# EAGLE board MRCS-Remote-Switch-Motor-Controller-Array (EAGLE 7.7.0)
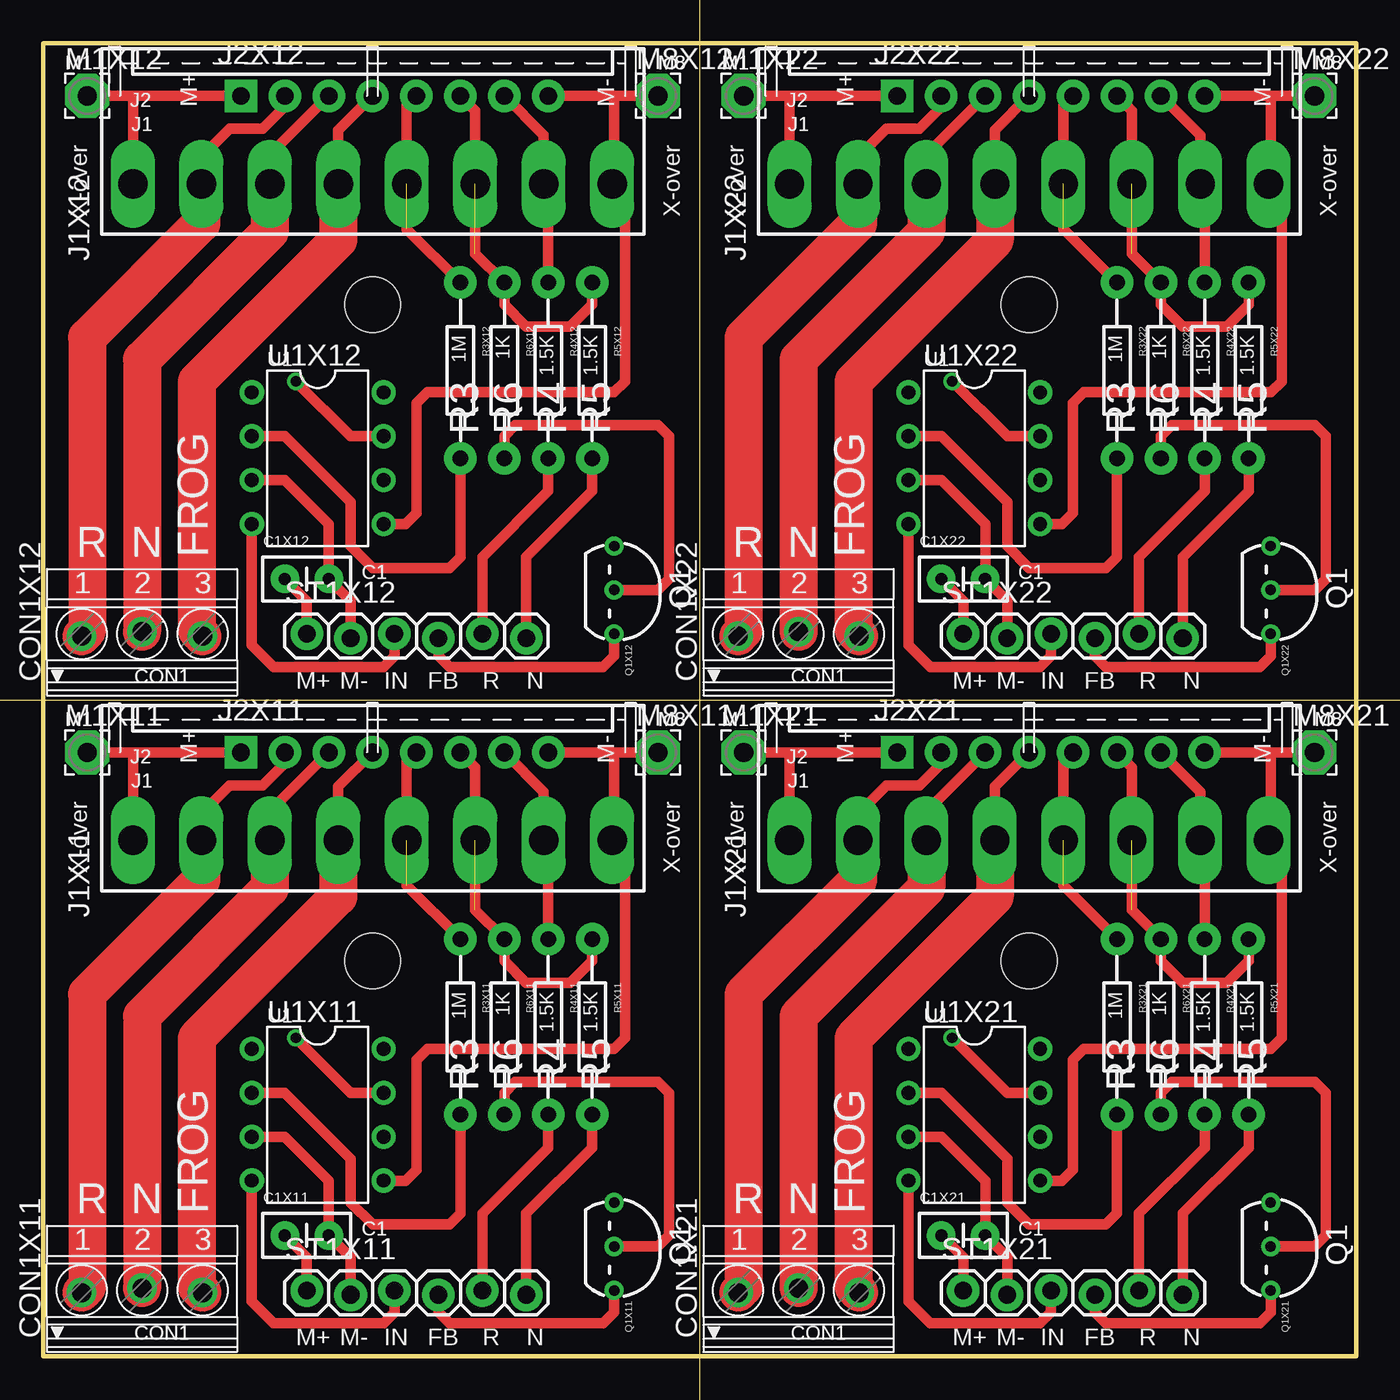
[diagram p0: board, top side]
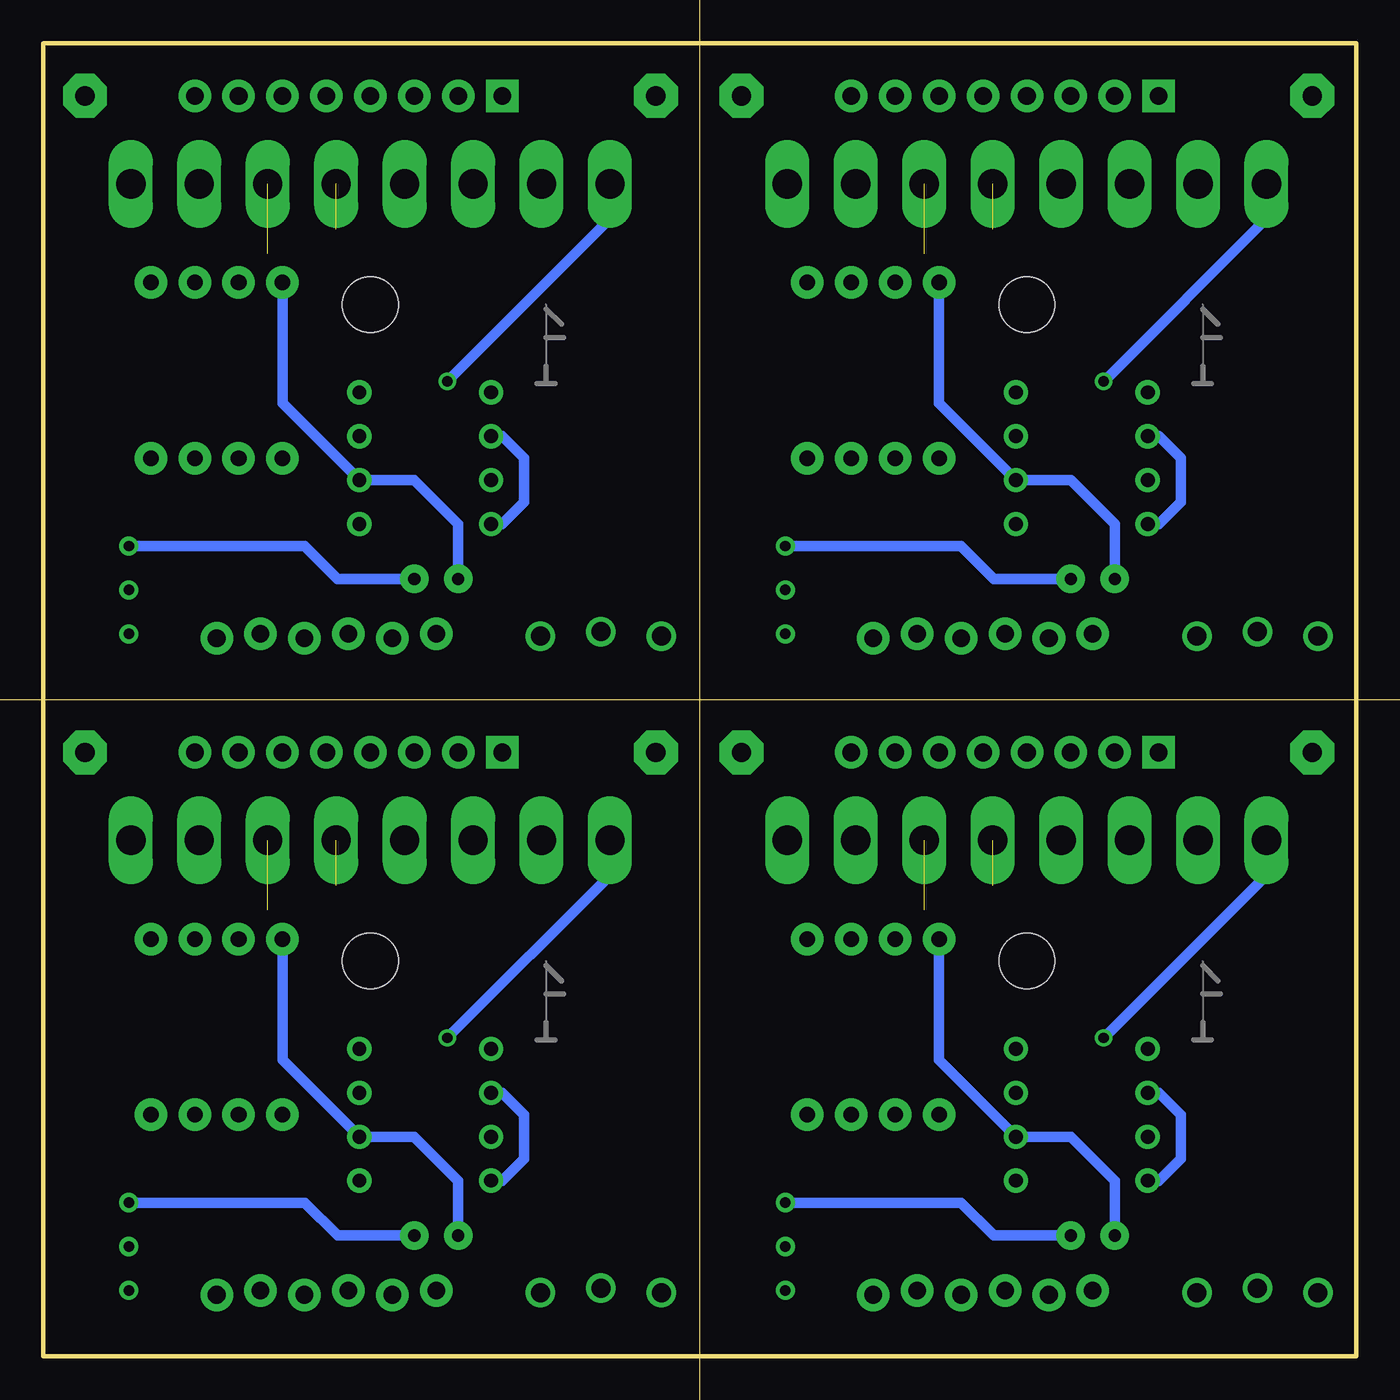
[diagram p1: board, bottom side, seen from below]

Size 75.95 x 75.95 mm. Coordinates in mm from the lower left corner, seen from the top.
Outline: 0,0 75.95,0 75.95,75.95 0,75.95 0,0
Copper layers (1*16): Top 0.035mm / dielectric 1.5mm / Bottom 0.035mm
Design rules "default": minimum track width 10mil, minimum drill 24mil, track to track 8mil, track to pad 8mil, pad to pad 8mil, via to via 8mil, smd to smd 8mil, copper to edge 40mil, drill to drill 8mil, minimum pad ring 10mil, minimum via ring 8mil, stop-mask expansion 4mil, vias tented up to drill 0mil, thermal gap 10mil
Holes 3.2 mm at 19.05,22.86 19.05,60.83 57.02,22.86 57.02,60.83
Milling: 2 lines

## Footprints (pad centres in the part's own frame; a part is rotated, then mirrored left to right if it is on the bottom)
CAP-PTH-SMALLEZ = drill 0.7 pad 1.651: 1 0,0; 2 2.54,0
1751251 = drill 1.1 pad 1.7: 1 -3.5,-0.127; 2 0,0.127; 3 3.5,-0.127
KK-156-8-F = drill 1.7 pad 2.184 long: 1 -13.86,0; 2 -9.9,0; 3 -5.94,0; 4 -1.98,0; 5 1.98,0; 6 5.94,0; 7 9.9,0; 8 13.86,0
1X08_PIN1_NO_SILK = drill 1.016 pad 1.88 square: 1 0,0 | drill 1.016 pad 1.88: 2 2.54,0; 3 5.08,0; 4 7.62,0; 5 10.16,0; 6 12.7,0; 7 15.24,0; 8 17.78,0
2,54/1,1 = drill 1.118 pad 2.54 octagon: 1 0,0
TO-92-MS013 = drill 0.6: 1 -2.54,0; 2 0,0; 3 2.54,0
AXIAL-0.4-RES = drill 0.9 pad 1.88: P$1 -5.08,0; P$2 5.08,0
1X06_LOCK = drill 1.016 pad 1.88: 1 0,0; 2 2.54,-0.254; 3 5.08,0; 4 7.62,-0.254; 5 10.16,0; 6 12.7,-0.254
DIL08 = drill 0.8 pad 1.4: 1 -3.81,-3.81; 2 -1.27,-3.81; 3 1.27,-3.81; 4 3.81,-3.81; 5 3.81,3.81; 6 1.27,3.81; 7 -1.27,3.81; 8 -3.81,3.81

## Placement (x,y rotation side)
C1X11  .01uF  [CAP-PTH-SMALLEZ]  13.97,6.99 0 top
C1X12  .01uF  [CAP-PTH-SMALLEZ]  13.97,44.96 0 top
C1X21  .01uF  [CAP-PTH-SMALLEZ]  51.94,6.99 0 top
C1X22  .01uF  [CAP-PTH-SMALLEZ]  51.94,44.96 0 top
CON1X11  CONNECTOR-M03350-LOCK  [1751251]  5.71,3.81 0 top
CON1X12  CONNECTOR-M03350-LOCK  [1751251]  5.71,41.78 0 top
CON1X21  CONNECTOR-M03350-LOCK  [1751251]  43.69,3.81 0 top
CON1X22  CONNECTOR-M03350-LOCK  [1751251]  43.69,41.78 0 top
J1X11  J1  [KK-156-8-F]  19.05,29.84 0 top
J1X12  J1  [KK-156-8-F]  19.05,67.82 0 top
J1X21  J1  [KK-156-8-F]  57.02,29.84 0 top
J1X22  J1  [KK-156-8-F]  57.02,67.82 0 top
J2X11  J2  [1X08_PIN1_NO_SILK]  11.43,34.92 0 top
J2X12  J2  [1X08_PIN1_NO_SILK]  11.43,72.9 0 top
J2X21  J2  [1X08_PIN1_NO_SILK]  49.4,34.92 0 top
J2X22  J2  [1X08_PIN1_NO_SILK]  49.4,72.9 0 top
M1X11  WIREPAD2,54/1,1  [2,54/1,1]  2.54,34.92 0 top
M1X12  WIREPAD2,54/1,1  [2,54/1,1]  2.54,72.9 0 top
M1X21  WIREPAD2,54/1,1  [2,54/1,1]  40.51,34.92 0 top
M1X22  WIREPAD2,54/1,1  [2,54/1,1]  40.51,72.9 0 top
M8X11  WIREPAD2,54/1,1  [2,54/1,1]  35.56,34.92 0 top
M8X12  WIREPAD2,54/1,1  [2,54/1,1]  35.56,72.9 0 top
M8X21  WIREPAD2,54/1,1  [2,54/1,1]  73.53,34.92 0 top
M8X22  WIREPAD2,54/1,1  [2,54/1,1]  73.53,72.9 0 top
Q1X11  2N3904  [TO-92-MS013]  33.02,6.35 270 top
Q1X12  2N3904  [TO-92-MS013]  33.02,44.32 270 top
Q1X21  2N3904  [TO-92-MS013]  70.99,6.35 270 top
Q1X22  2N3904  [TO-92-MS013]  70.99,44.32 270 top
R3X11  1M  [AXIAL-0.4-RES]  24.13,19.05 270 top
R3X12  1M  [AXIAL-0.4-RES]  24.13,57.02 270 top
R3X21  1M  [AXIAL-0.4-RES]  62.1,19.05 270 top
R3X22  1M  [AXIAL-0.4-RES]  62.1,57.02 270 top
R4X11  1.5K  [AXIAL-0.4-RES]  29.21,19.05 270 top
R4X12  1.5K  [AXIAL-0.4-RES]  29.21,57.02 270 top
R4X21  1.5K  [AXIAL-0.4-RES]  67.18,19.05 270 top
R4X22  1.5K  [AXIAL-0.4-RES]  67.18,57.02 270 top
R5X11  1.5K  [AXIAL-0.4-RES]  31.75,19.05 270 top
R5X12  1.5K  [AXIAL-0.4-RES]  31.75,57.02 270 top
R5X21  1.5K  [AXIAL-0.4-RES]  69.72,19.05 270 top
R5X22  1.5K  [AXIAL-0.4-RES]  69.72,57.02 270 top
R6X11  1K  [AXIAL-0.4-RES]  26.67,19.05 270 top
R6X12  1K  [AXIAL-0.4-RES]  26.67,57.02 270 top
R6X21  1K  [AXIAL-0.4-RES]  64.64,19.05 270 top
R6X22  1K  [AXIAL-0.4-RES]  64.64,57.02 270 top
ST1X11  [1X06_LOCK]  15.24,3.81 0 top
ST1X12  [1X06_LOCK]  15.24,41.78 0 top
ST1X21  [1X06_LOCK]  53.21,3.81 0 top
ST1X22  [1X06_LOCK]  53.21,41.78 0 top
U1X11  TC4428A  [DIL08]  15.88,13.97 270 top
U1X12  TC4428A  [DIL08]  15.88,51.94 270 top
U1X21  TC4428A  [DIL08]  53.85,13.97 270 top
U1X22  TC4428A  [DIL08]  53.85,51.94 270 top
U$1X11  [MRCSLOGOBTM]  2.54,17.78 0 top
U$1X12  [MRCSLOGOBTM]  2.54,55.75 0 top
U$1X21  [MRCSLOGOBTM]  40.51,17.78 0 top
U$1X22  [MRCSLOGOBTM]  40.51,55.75 0 top
U$2X11  [CA-PROP65WARNING]  24.13,27.94 0 top
U$2X12  [CA-PROP65WARNING]  24.13,65.91 0 top
U$2X21  [CA-PROP65WARNING]  62.1,27.94 0 top
U$2X22  [CA-PROP65WARNING]  62.1,65.91 0 top

## Library data of the parts
C1X11 C1X12 C1X21 C1X22 = SparkFun-Passives
CON1X11 CON1X12 CON1X21 CON1X22 J1X11 J1X12 J1X21 J1X22 Q1X11 Q1X12 Q1X21 Q1X22 R3X11 R3X12 R3X21 R3X22 R4X11 R4X12 R4X21 R4X22 R5X11 R5X12 R5X21 R5X22 R6X11 R6X12 R6X21 R6X22 = SPCoast
J2X11 J2X12 J2X21 J2X22 ST1X11 ST1X12 ST1X21 ST1X22 = SparkFun-Connectors
M1X11 M1X12 M1X21 M1X22 M8X11 M8X12 M8X21 M8X22 = wirepad
U1X11 U1X12 U1X21 U1X22 = ir
U$1X11 U$1X12 U$1X21 U$1X22 = MRCSLogoBtm
U$2X11 U$2X12 U$2X21 U$2X22 = MRCS-prop65warningBtm

## Nets
FROGX11: CON1X11.3 J1X11.4 J2X11.4
FROGX12: CON1X12.3 J1X12.4 J2X12.4
FROGX21: CON1X21.3 J1X21.4 J2X21.4
FROGX22: CON1X22.3 J1X22.4 J2X22.4
GNDX11: C1X11.2 Q1X11.1 ST1X11.2 U1X11.3
GNDX12: C1X12.2 Q1X12.1 ST1X12.2 U1X12.3
GNDX21: C1X21.2 Q1X21.1 ST1X21.2 U1X21.3
GNDX22: C1X22.2 Q1X22.1 ST1X22.2 U1X22.3
M+X11: J1X11.1 J2X11.1 M1X11.1 U1X11.7
M+X12: J1X12.1 J2X12.1 M1X12.1 U1X12.7
M+X21: J1X21.1 J2X21.1 M1X21.1 U1X21.7
M+X22: J1X22.1 J2X22.1 M1X22.1 U1X22.7
M-X11: J1X11.8 J2X11.8 M8X11.1 U1X11.5
M-X12: J1X12.8 J2X12.8 M8X12.1 U1X12.5
M-X21: J1X21.8 J2X21.8 M8X21.1 U1X21.5
M-X22: J1X22.8 J2X22.8 M8X22.1 U1X22.5
N$3X11: Q1X11.3 ST1X11.4
N$3X12: Q1X12.3 ST1X12.4
N$3X21: Q1X21.3 ST1X21.4
N$3X22: Q1X22.3 ST1X22.4
N$4X11: R4X11.P$2 ST1X11.5
N$4X12: R4X12.P$2 ST1X12.5
N$4X21: R4X21.P$2 ST1X21.5
N$4X22: R4X22.P$2 ST1X22.5
N$8X11: Q1X11.2 R6X11.P$2
N$8X12: Q1X12.2 R6X12.P$2
N$8X21: Q1X21.2 R6X21.P$2
N$8X22: Q1X22.2 R6X22.P$2
N$9X11: R5X11.P$2 ST1X11.6
N$9X12: R5X12.P$2 ST1X12.6
N$9X21: R5X21.P$2 ST1X21.6
N$9X22: R5X22.P$2 ST1X22.6
N$14X11: R3X11.P$2 ST1X11.3 U1X11.2 U1X11.4
N$14X12: R3X12.P$2 ST1X12.3 U1X12.2 U1X12.4
N$14X21: R3X21.P$2 ST1X21.3 U1X21.2 U1X21.4
N$14X22: R3X22.P$2 ST1X22.3 U1X22.2 U1X22.4
N-LEDX11: J1X11.7 J2X11.7 R4X11.P$1
N-LEDX12: J1X12.7 J2X12.7 R4X12.P$1
N-LEDX21: J1X21.7 J2X21.7 R4X21.P$1
N-LEDX22: J1X22.7 J2X22.7 R4X22.P$1
NORMX11: CON1X11.2 J1X11.3 J2X11.3
NORMX12: CON1X12.2 J1X12.3 J2X12.3
NORMX21: CON1X21.2 J1X21.3 J2X21.3
NORMX22: CON1X22.2 J1X22.3 J2X22.3
R-LEDX11: J1X11.6 J2X11.6 R5X11.P$1 R6X11.P$1
R-LEDX12: J1X12.6 J2X12.6 R5X12.P$1 R6X12.P$1
R-LEDX21: J1X21.6 J2X21.6 R5X21.P$1 R6X21.P$1
R-LEDX22: J1X22.6 J2X22.6 R5X22.P$1 R6X22.P$1
REVX11: CON1X11.1 J1X11.2 J2X11.2
REVX12: CON1X12.1 J1X12.2 J2X12.2
REVX21: CON1X21.1 J1X21.2 J2X21.2
REVX22: CON1X22.1 J1X22.2 J2X22.2
V+X11: C1X11.1 J1X11.5 J2X11.5 R3X11.P$1 ST1X11.1 U1X11.6
V+X12: C1X12.1 J1X12.5 J2X12.5 R3X12.P$1 ST1X12.1 U1X12.6
V+X21: C1X21.1 J1X21.5 J2X21.5 R3X21.P$1 ST1X21.1 U1X21.6
V+X22: C1X22.1 J1X22.5 J2X22.5 R3X22.P$1 ST1X22.1 U1X22.6

## Tracks (layer width: path | path; a pad name or v marks a point on that pad's centre or on a via)
FROGX11
  Top 0.61: J1X11.4 17.07,32.95 J2X11.4
  Top 2.184: J1X11.4 17.07,26.59 8.89,18.41 8.89,4.01 CON1X11.3
FROGX12
  Top 0.61: J1X12.4 17.07,70.92 J2X12.4
  Top 2.184: J1X12.4 17.07,64.57 8.89,56.39 8.89,41.98 CON1X12.3
FROGX21
  Top 0.61: J1X21.4 55.04,32.95 J2X21.4
  Top 2.184: J1X21.4 55.04,26.59 46.86,18.41 46.86,4.01 CON1X21.3
FROGX22
  Top 0.61: J1X22.4 55.04,70.92 J2X22.4
  Top 2.184: J1X22.4 55.04,64.57 46.86,56.39 46.86,41.98 CON1X22.3
GNDX11
  Top 0.61: ST1X11.2 17.78,5.71 C1X11.2 16.51,10.16 13.97,12.7 U1X11.3
  Bottom 0.61: Q1X11.1 22.86,8.89 20.95,6.99 C1X11.2
GNDX12
  Top 0.61: ST1X12.2 17.78,43.69 C1X12.2 16.51,48.13 13.97,50.67 U1X12.3
  Bottom 0.61: Q1X12.1 22.86,46.86 20.95,44.96 C1X12.2
GNDX21
  Top 0.61: ST1X21.2 55.75,5.71 C1X21.2 54.48,10.16 51.94,12.7 U1X21.3
  Bottom 0.61: Q1X21.1 60.83,8.89 58.93,6.99 C1X21.2
GNDX22
  Top 0.61: ST1X22.2 55.75,43.69 C1X22.2 54.48,48.13 51.94,50.67 U1X22.3
  Bottom 0.61: Q1X22.1 60.83,46.86 58.93,44.96 C1X22.2
M+X11  (via drill 0.6 pad 1.01)
  Top 0.61: M1X11.1 5.08,34.92 | 5.08,34.92 J2X11.1 | J1X11.1 5.19,34.81 5.08,34.92 | U1X11.7 17.78,15.24 v14.61,18.41
  Bottom 0.61: v14.61,18.41 5.08,27.94 5.08,29.73 J1X11.1
M+X12  (via drill 0.6 pad 1.01)
  Top 0.61: M1X12.1 5.08,72.9 | 5.08,72.9 J2X12.1 | J1X12.1 5.19,72.79 5.08,72.9 | U1X12.7 17.78,53.21 v14.61,56.39
  Bottom 0.61: v14.61,56.39 5.08,65.91 5.08,67.71 J1X12.1
M+X21  (via drill 0.6 pad 1.01)
  Top 0.61: M1X21.1 43.05,34.92 | 43.05,34.92 J2X21.1 | J1X21.1 43.16,34.81 43.05,34.92 | U1X21.7 55.75,15.24 v52.58,18.41
  Bottom 0.61: v52.58,18.41 43.05,27.94 43.05,29.73 J1X21.1
M+X22  (via drill 0.6 pad 1.01)
  Top 0.61: M1X22.1 43.05,72.9 | 43.05,72.9 J2X22.1 | J1X22.1 43.16,72.79 43.05,72.9 | U1X22.7 55.75,53.21 v52.58,56.39
  Bottom 0.61: v52.58,56.39 43.05,65.91 43.05,67.71 J1X22.1
M-X11
  Top 0.61: J2X11.8 33.02,34.92 | 33.02,34.92 M8X11.1 | 33.02,34.92 33.02,29.95 J1X11.8 33.66,29.1 33.66,18.41 33.02,17.78 22.23,17.78 21.59,17.14 21.59,10.79 20.95,10.16 U1X11.5
M-X12
  Top 0.61: J2X12.8 33.02,72.9 | 33.02,72.9 M8X12.1 | 33.02,72.9 33.02,67.93 J1X12.8 33.66,67.07 33.66,56.39 33.02,55.75 22.23,55.75 21.59,55.12 21.59,48.77 20.95,48.13 U1X12.5
M-X21
  Top 0.61: J2X21.8 70.99,34.92 | 70.99,34.92 M8X21.1 | 70.99,34.92 70.99,29.95 J1X21.8 71.63,29.1 71.63,18.41 70.99,17.78 60.2,17.78 59.56,17.14 59.56,10.79 58.93,10.16 U1X21.5
M-X22
  Top 0.61: J2X22.8 70.99,72.9 | 70.99,72.9 M8X22.1 | 70.99,72.9 70.99,67.93 J1X22.8 71.63,67.07 71.63,56.39 70.99,55.75 60.2,55.75 59.56,55.12 59.56,48.77 58.93,48.13 U1X22.5
N$3X11
  Top 0.61: ST1X11.4 22.86,2.54 23.5,1.91 32.38,1.91 33.02,2.54 Q1X11.3
N$3X12
  Top 0.61: ST1X12.4 22.86,40.51 23.5,39.88 32.38,39.88 33.02,40.51 Q1X12.3
N$3X21
  Top 0.61: ST1X21.4 60.83,2.54 61.47,1.91 70.36,1.91 70.99,2.54 Q1X21.3
N$3X22
  Top 0.61: ST1X22.4 60.83,40.51 61.47,39.88 70.36,39.88 70.99,40.51 Q1X22.3
N$4X11
  Top 0.61: ST1X11.5 25.4,8.26 29.21,12.06 R4X11.P$2
N$4X12
  Top 0.61: ST1X12.5 25.4,46.23 29.21,50.04 R4X12.P$2
N$4X21
  Top 0.61: ST1X21.5 63.37,8.26 67.18,12.06 R4X21.P$2
N$4X22
  Top 0.61: ST1X22.5 63.37,46.23 67.18,50.04 R4X22.P$2
N$8X11
  Top 0.61: Q1X11.2 35.56,6.35 36.2,6.99 36.2,15.24 35.56,15.88 27.3,15.88 26.67,15.24 R6X11.P$2
N$8X12
  Top 0.61: Q1X12.2 35.56,44.32 36.2,44.96 36.2,53.21 35.56,53.85 27.3,53.85 26.67,53.21 R6X12.P$2
N$8X21
  Top 0.61: Q1X21.2 73.53,6.35 74.17,6.99 74.17,15.24 73.53,15.88 65.28,15.88 64.64,15.24 R6X21.P$2
N$8X22
  Top 0.61: Q1X22.2 73.53,44.32 74.17,44.96 74.17,53.21 73.53,53.85 65.28,53.85 64.64,53.21 R6X22.P$2
N$9X11
  Top 0.61: ST1X11.6 27.94,8.26 31.75,12.06 R5X11.P$2
N$9X12
  Top 0.61: ST1X12.6 27.94,46.23 31.75,50.04 R5X12.P$2
N$9X21
  Top 0.61: ST1X21.6 65.91,8.26 69.72,12.06 R5X21.P$2
N$9X22
  Top 0.61: ST1X22.6 65.91,46.23 69.72,50.04 R5X22.P$2
N$14X11
  Top 0.61: U1X11.4 12.06,3.17 13.34,1.91 19.68,1.91 20.32,2.54 ST1X11.3 | U1X11.2 13.97,15.24 17.78,11.43 17.78,8.89 19.05,7.62 23.5,7.62 24.13,8.26 R3X11.P$2
  Bottom 0.61: U1X11.4 11.43,10.16 10.16,11.43 10.16,13.97 11.43,15.24 U1X11.2
N$14X12
  Top 0.61: U1X12.4 12.06,41.15 13.34,39.88 19.68,39.88 20.32,40.51 ST1X12.3 | U1X12.2 13.97,53.21 17.78,49.4 17.78,46.86 19.05,45.59 23.5,45.59 24.13,46.23 R3X12.P$2
  Bottom 0.61: U1X12.4 11.43,48.13 10.16,49.4 10.16,51.94 11.43,53.21 U1X12.2
N$14X21
  Top 0.61: U1X21.4 50.04,3.17 51.31,1.91 57.66,1.91 58.29,2.54 ST1X21.3 | U1X21.2 51.94,15.24 55.75,11.43 55.75,8.89 57.02,7.62 61.47,7.62 62.1,8.26 R3X21.P$2
  Bottom 0.61: U1X21.4 49.4,10.16 48.13,11.43 48.13,13.97 49.4,15.24 U1X21.2
N$14X22
  Top 0.61: U1X22.4 50.04,41.15 51.31,39.88 57.66,39.88 58.29,40.51 ST1X22.3 | U1X22.2 51.94,53.21 55.75,49.4 55.75,46.86 57.02,45.59 61.47,45.59 62.1,46.23 R3X22.P$2
  Bottom 0.61: U1X22.4 49.4,48.13 48.13,49.4 48.13,51.94 49.4,53.21 U1X22.2
N-LEDX11
  Top 0.61: J2X11.7 28.95,32.65 J1X11.7 29.21,29.59 R4X11.P$1
N-LEDX12
  Top 0.61: J2X12.7 28.95,70.62 J1X12.7 29.21,67.56 R4X12.P$1
N-LEDX21
  Top 0.61: J2X21.7 66.92,32.65 J1X21.7 67.18,29.59 R4X21.P$1
N-LEDX22
  Top 0.61: J2X22.7 66.92,70.62 J1X22.7 67.18,67.56 R4X22.P$1
NORMX11
  Top 0.61: J1X11.3 13.11,31.52 J2X11.3
  Top 2.184: J1X11.3 13.11,27.08 5.71,19.68 CON1X11.2
NORMX12
  Top 0.61: J1X12.3 13.11,69.5 J2X12.3
  Top 2.184: J1X12.3 13.11,65.05 5.71,57.66 CON1X12.2
NORMX21
  Top 0.61: J1X21.3 51.08,31.52 J2X21.3
  Top 2.184: J1X21.3 51.08,27.08 43.69,19.68 CON1X21.2
NORMX22
  Top 0.61: J1X22.3 51.08,69.5 J2X22.3
  Top 2.184: J1X22.3 51.08,65.05 43.69,57.66 CON1X22.2
R-LEDX11  (1 unrouted)
  Top 0.61: J2X11.6 24.99,34.06 24.99,25.81 R6X11.P$1 26.67,22.86 27.94,21.59 30.48,21.59 31.75,22.86 R5X11.P$1
R-LEDX12  (1 unrouted)
  Top 0.61: J2X12.6 24.99,72.04 24.99,63.78 R6X12.P$1 26.67,60.83 27.94,59.56 30.48,59.56 31.75,60.83 R5X12.P$1
R-LEDX21  (1 unrouted)
  Top 0.61: J2X21.6 62.96,34.06 62.96,25.81 R6X21.P$1 64.64,22.86 65.91,21.59 68.45,21.59 69.72,22.86 R5X21.P$1
R-LEDX22  (1 unrouted)
  Top 0.61: J2X22.6 62.96,72.04 62.96,63.78 R6X22.P$1 64.64,60.83 65.91,59.56 68.45,59.56 69.72,60.83 R5X22.P$1
REVX11
  Top 0.61: J1X11.2 9.15,31.38 10.79,33.02 12.7,33.02 13.97,34.29 J2X11.2
  Top 2.184: J1X11.2 9.15,27.57 2.54,20.95 2.54,4.01 CON1X11.1
REVX12
  Top 0.61: J1X12.2 9.15,69.35 10.79,70.99 12.7,70.99 13.97,72.26 J2X12.2
  Top 2.184: J1X12.2 9.15,65.54 2.54,58.93 2.54,41.98 CON1X12.1
REVX21
  Top 0.61: J1X21.2 47.12,31.38 48.77,33.02 50.67,33.02 51.94,34.29 J2X21.2
  Top 2.184: J1X21.2 47.12,27.57 40.51,20.95 40.51,4.01 CON1X21.1
REVX22
  Top 0.61: J1X22.2 47.12,69.35 48.77,70.99 50.67,70.99 51.94,72.26 J2X22.2
  Top 2.184: J1X22.2 47.12,65.54 40.51,58.93 40.51,41.98 CON1X22.1
V+X11  (1 unrouted)
  Top 0.61: J2X11.5 21.03,34.37 21.03,27.23 R3X11.P$1 | ST1X11.1 15.24,5.71 C1X11.1
  Bottom 0.61: R3X11.P$1 24.13,17.14 U1X11.6 16.51,12.7 13.97,10.16 C1X11.1
V+X12  (1 unrouted)
  Top 0.61: J2X12.5 21.03,72.34 21.03,65.2 R3X12.P$1 | ST1X12.1 15.24,43.69 C1X12.1
  Bottom 0.61: R3X12.P$1 24.13,55.12 U1X12.6 16.51,50.67 13.97,48.13 C1X12.1
V+X21  (1 unrouted)
  Top 0.61: J2X21.5 59,34.37 59,27.23 R3X21.P$1 | ST1X21.1 53.21,5.71 C1X21.1
  Bottom 0.61: R3X21.P$1 62.1,17.14 U1X21.6 54.48,12.7 51.94,10.16 C1X21.1
V+X22  (1 unrouted)
  Top 0.61: J2X22.5 59,72.34 59,65.2 R3X22.P$1 | ST1X22.1 53.21,43.69 C1X22.1
  Bottom 0.61: R3X22.P$1 62.1,55.12 U1X22.6 54.48,50.67 51.94,48.13 C1X22.1

## Text on the board
tPlace: M+ | M- | M+ | M- | X-over | X-over | X-over | X-over | R | N | FROG | R | N | FROG | M+ | M- | IN | FB | R | N | M+ | M- | IN | FB | R | N | M+ | M- | M+ | M- | X-over | X-over | X-over | X-over | R | N | FROG | R | N | FROG | M+ | M- | IN | FB | R | N | M+ | M- | IN | FB | R | N
Milling: V-Score | V-Score
bDocu: RSMC V1.9 | RSMC V1.9 | RSMC V1.9 | RSMC V1.9
_tNames: M1 | M1 | M8 | M8 | M1 | M1 | M8 | M8 | J2 | J2 | J2 | J2 | J1 | J1 | J1 | J1 | U1 | U1 | U1 | U1 | R3 | R3 | R6 | R6 | R4 | R4 | R5 | R5 | R3 | R3 | R6 | R6 | R4 | R4 | R5 | R5 | Q1 | Q1 | Q1 | Q1 | C1 | C1 | C1 | C1 | ST1 | ST1 | ST1 | ST1 | CON1 | CON1 | CON1 | CON1 | M1 | M1 | M8 | M8 | M1 | M1 | M8 | M8 | J2 | J2 | J2 | J2 | J1 | J1 | J1 | J1 | U1 | U1 | U1 | U1 | R3 | R3 | R6 | R6 | R4 | R4 | R5 | R5 | R3 | R3 | R6 | R6 | R4 | R4 | R5 | R5 | Q1 | Q1 | Q1 | Q1 | C1 | C1 | C1 | C1 | ST1 | ST1 | ST1 | ST1 | CON1 | CON1 | CON1 | CON1